# Altium PCB 3PhaseMotorDriver.PcbDoc
Units mm, origin at the board's own origin, x right, y up, seen from the top; angles counter-clockwise.
Board outline 107.82 x 93.09 mm, 2 copper layers (Top Layer, Bottom Layer); 80 components, 41 nets, 272 pads, 43 vias.
Unrouted connection lines stored in the file: 43.
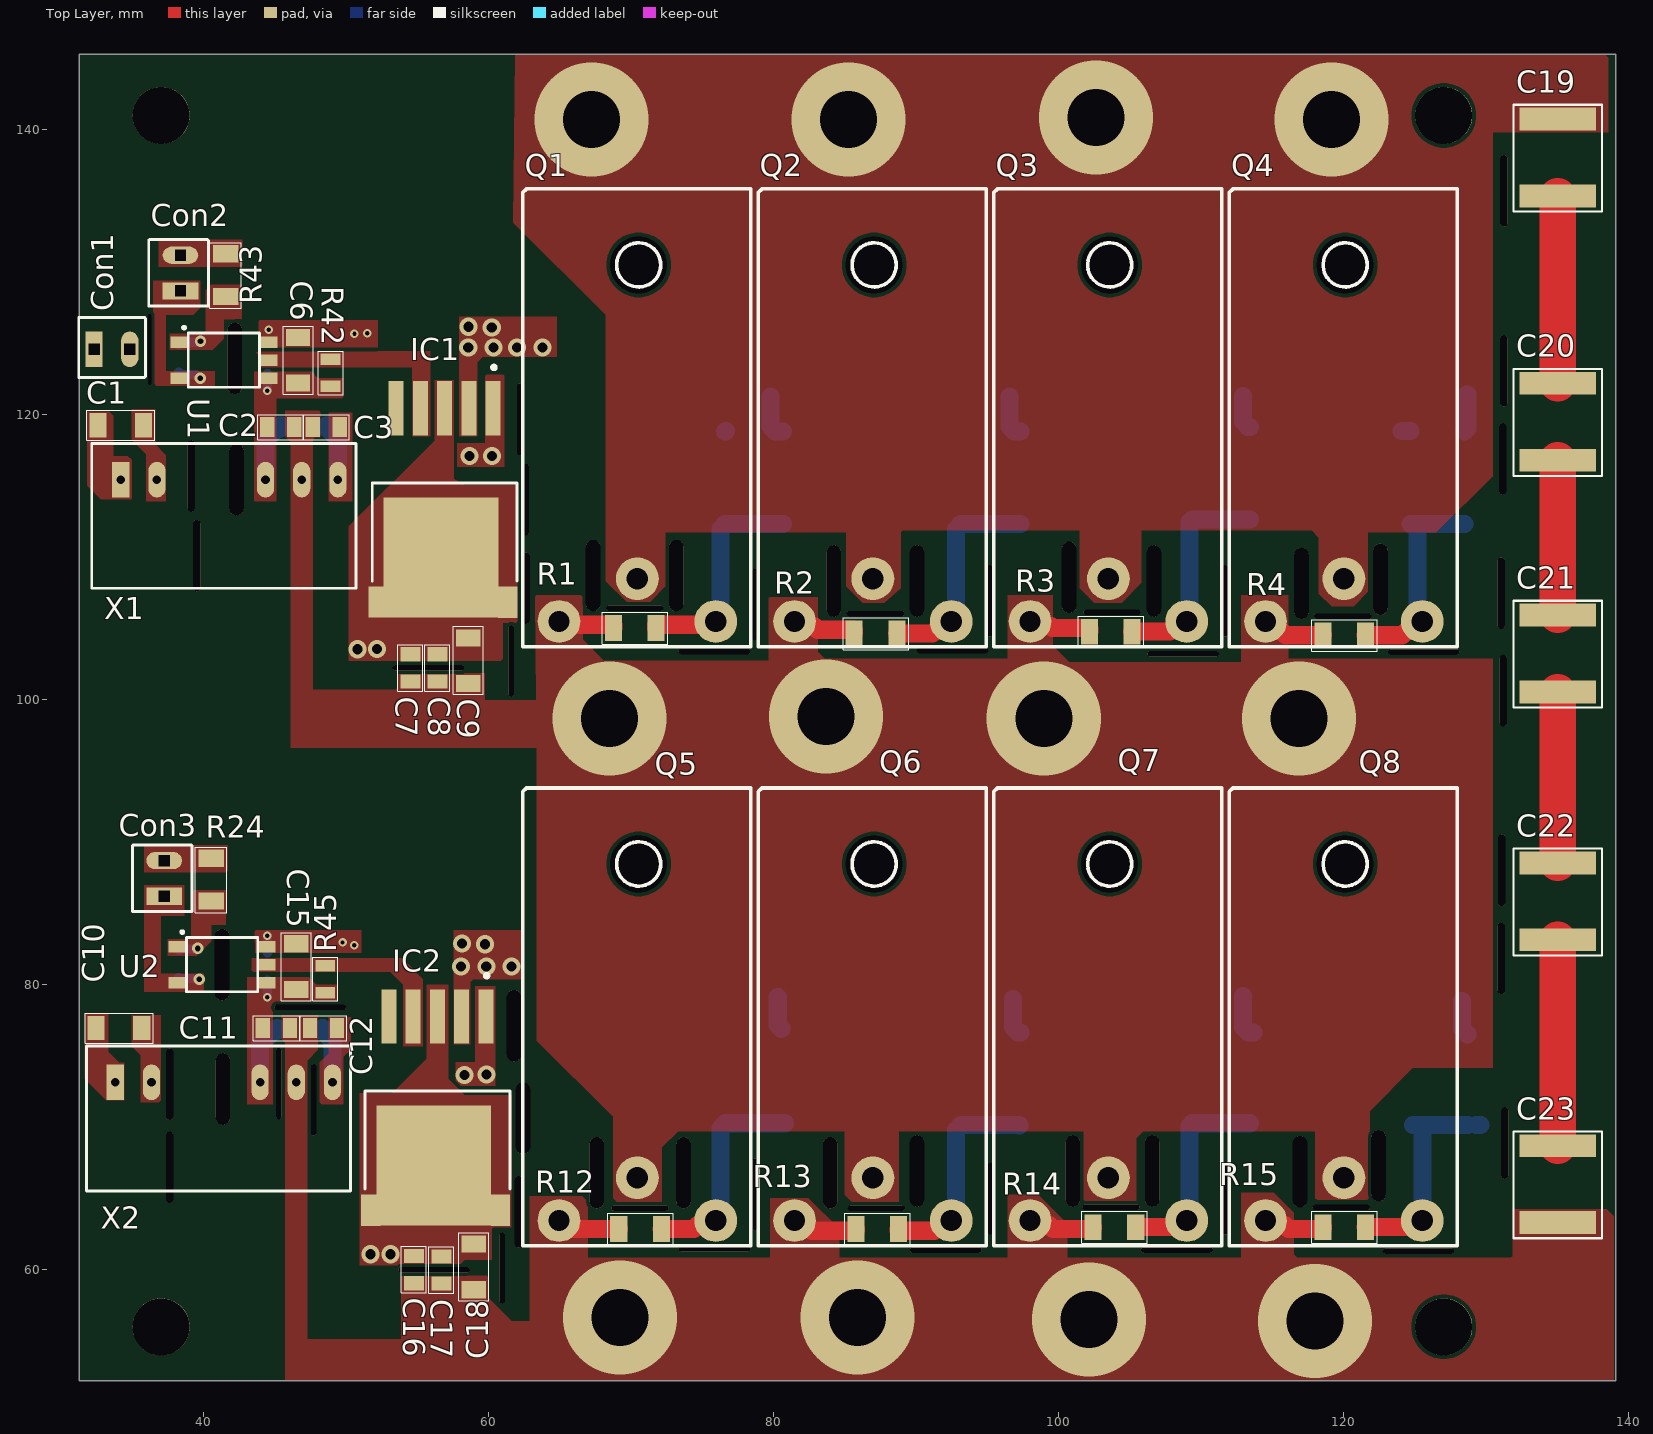
[diagram p0: Top Layer view]
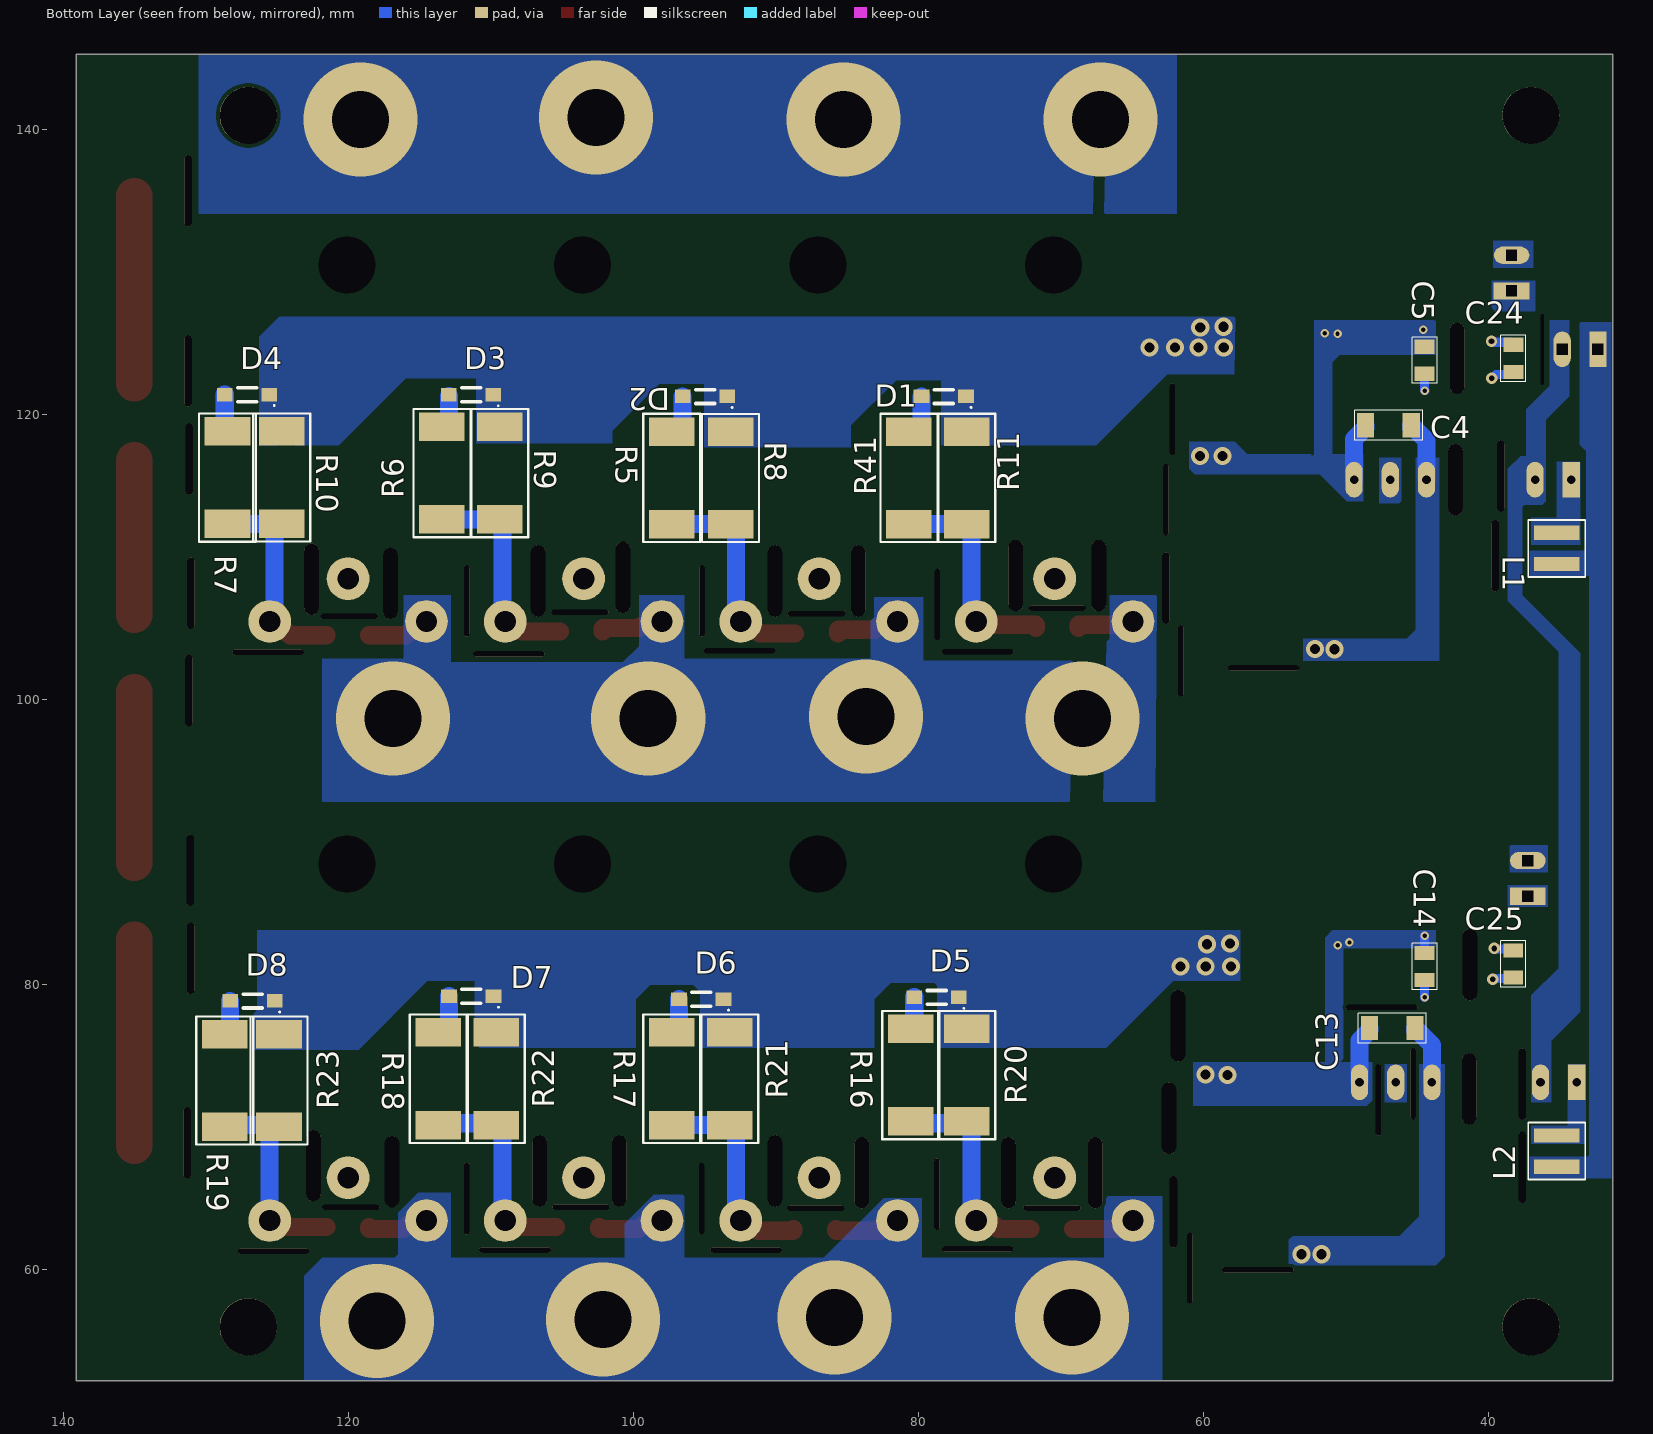
[diagram p1: Bottom Layer view, seen from below]
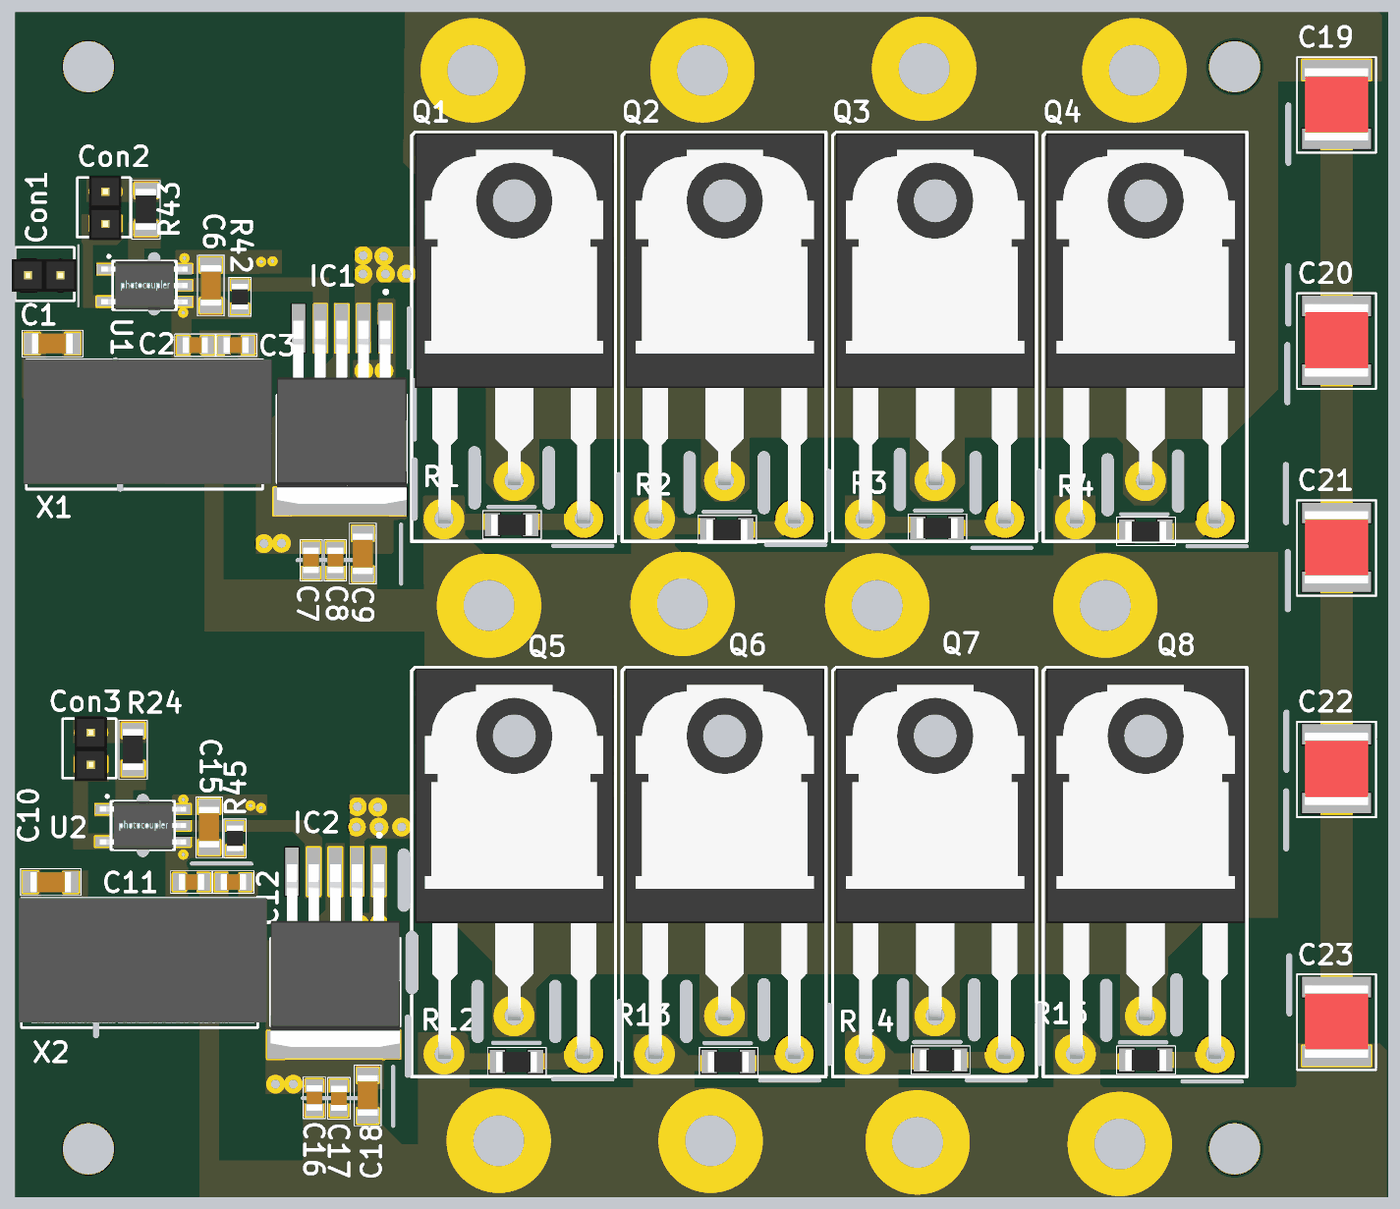
[diagram p2: 3D render of the assembled board from above, using the file's embedded part models]
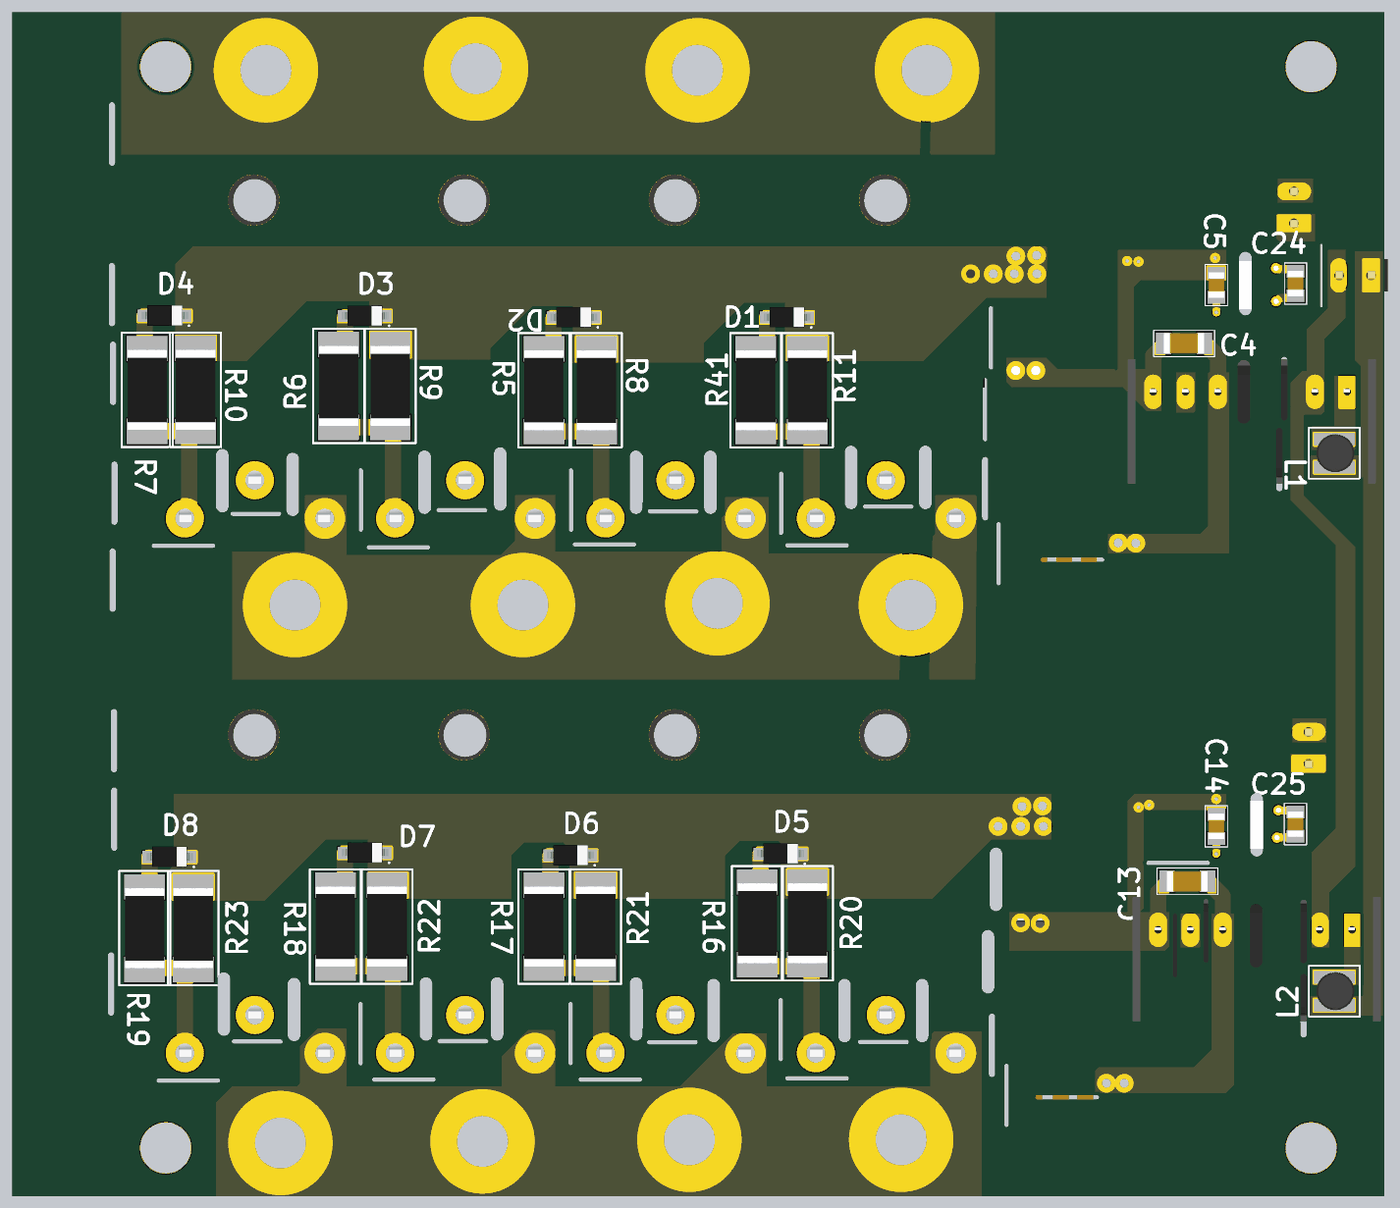
[diagram p3: 3D render of the assembled board from below, using the file's embedded part models]

## Layer stack, top to bottom
Top Solder: solder mask 0.0102, Solder Resist, Dk 3.5
Top Layer: signal copper 0.0356
Dielectric 1: dielectric 0.32, FR-4, Dk 4.8
Bottom Layer: signal copper 0.0356
Bottom Solder: solder mask 0.0102, Solder Resist, Dk 3.5

## Board outline
31.242,52.197 31.242,145.288 139.065,145.288 139.065,52.197

## Design rules (kind name [scope] priority, off if disabled: settings)
Clearance [All] p1: gap=0.254 ignorepadtopadclearanceinfootprint=FALSE except(0: Arc-Hole Track-Hole SMDPad-Hole THPad-Hole Via-Hole Fill-Hole Poly-Hole Region-Hole Text-Hole)
PolygonConnect [All] p1: connectstyle=Direct reliefconductorwidth=0.254 reliefentries=4 polygonreliefangle="90 Angle" airgapwidth=0.254
RoutingVias [All] p1: holewidth=0.711 width=1.27 viastyle="Through Hole" minholewidth=0.711 minwidth=1.27 maxholewidth=0.711 maxwidth=1.27
SolderMaskExpansion [All] p1: expansion=0.102 istentingtop=FALSE
Width [All] p1: maxlimit=3 minlimit=0.254 preferedwidth=0.254 minimp=50.000000 maximp=50.000000 favimp=50.000000
30 further rules are at their usual default settings.

## Components (designator, comment, footprint, x,y, rotation, side; value= is the part's Value field where it differs from the comment)
C1 "4.7uF" C-1206 34.163,119.253 r180 top
C2 "2.2u" C-0805 45.39,119.126 r180 top locked
C3 "2.2u" C-0805 48.59,119.126 r180 top locked
C4 "4.7uF" C-1206 46.99,119.253 r0 bottom
C5 "100nF" C-0805 44.45,123.825 r90 bottom locked
C6 "4.7uF" C-1206 46.609,123.825 r90 top locked
C7 "10nF" C-0805 54.483,102.235 r270 top
C8 "100nF" C-0805 56.388,102.235 r270 top
C9 "4.7uF" C-1206 58.547,102.743 r270 top
C10 "4.7uF" C-1206 34.036,76.962 r180 top
C11 "2.2u" C-0805 45.085,76.962 r180 top
C12 "2.2u" C-0805 48.387,76.962 r180 top
C13 "4.7uF" C-1206 46.736,76.962 r0 bottom
C14 "100nF" C-0805 44.45,81.28 r90 bottom locked
C15 "4.7uF" C-1206 46.482,81.28 r90 top locked
C16 "10nF" C-0805 54.737,60.01 r270 top locked
C17 "100nF" C-0805 56.668,59.978 r270 top
C18 "4.7uF" C-1206 58.928,60.198 r270 top locked
C19 "10uF" C-2220R 135,138.049 r90 top
C20 "10uF" C-2220R 135,119.507 r90 top
C21 "10uF" C-2220R 135,103.251 r90 top
C22 "10uF" C-2220R 135,85.852 r90 top
C23 "10uF" C-2220R 135,66.008 r90 top
C24 "10nF" C-0805 38.227,123.952 r90 bottom
C25 "10nF" C-0805 38.236,81.458 r90 bottom
Con1 "Connector" Conn 32.323,124.587 r90 top
Con2 "Connector2_1" Conn 38.354,128.716 r180 top
Con3 "Connector2_1" Conn 37.211,86.233 r180 top
D1 "1n5819" SOD123 76.693,121.335 r0 bottom
D2 "1n5819" SOD123 93.457,121.335 r0 bottom
D3 "1n5819" SOD123 109.867,121.455 r0 bottom
D4 "1n5819" SOD123 125.588,121.462 r0 bottom
D5 "1n5819" SOD123 77.201,79.171 r0 bottom
D6 "1n5819" SOD123 93.711,79.044 r0 bottom
D7 "1n5819" SOD123 109.855,79.248 r0 bottom
D8 "1n5819" SOD123 125.207,78.917 r0 bottom
IC1 "IXDN630YI" 5-LEAD_TO-263 56.893,107.955 r180 top
IC2 "IXDN630YI" 5-LEAD_TO-263 56.388,65.278 r180 top locked
L1 "10uH" WE-TPC_282892 35.179,110.617 r0 bottom
L2 "10uH" WE-TPC_282892 35.179,68.326 r0 bottom
Q1 "Sic Mosfet" 247 64.918,105.491 r0 top locked
Q2 "Sic Mosfet" 247 81.444,105.491 r0 top locked
Q3 "Sic Mosfet" 247 97.97,105.491 r0 top locked
Q4 "Sic Mosfet" 247 114.496,105.491 r0 top locked
Q5 "Sic Mosfet" 247 64.918,63.454 r0 top locked
Q6 "Sic Mosfet" 247 81.444,63.454 r0 top locked
Q7 "Sic Mosfet" 247 97.97,63.454 r0 top locked
Q8 "Sic Mosfet" 247 114.496,63.454 r0 top locked
R1 "10K" R-1206 70.231,105.029 r180 top
R2 "10K" R-1206 87.122,104.648 r180 top
R3 "10K" R-1206 103.632,104.775 r180 top
R4 "10K" R-1206 120.015,104.521 r180 top
R5 "10 1w" R-2512W 97.282,115.57 r90 bottom
R6 "10 1w" R-2512W 113.411,115.899 r90 bottom
R7 "10 1w" R-2512W 128.46,115.588 r90 bottom
R8 "10 1w" R-2512W 93.154,115.558 r270 bottom
R9 "10 1w" R-2512W 109.356,115.899 r270 bottom
R10 "10 1w" R-2512W 124.656,115.593 r270 bottom
R11 "10 1w" R-2512W 76.581,115.57 r270 bottom
R12 "10K" R-1206 70.612,62.865 r180 top
R13 "10K" R-1206 87.249,62.865 r180 top
R14 "10K" R-1206 103.886,62.992 r180 top
R15 "10K" R-1206 120.015,62.992 r180 top
R16 "10 1w" R-2512W 80.518,73.66 r90 bottom
R17 "10 1w" R-2512W 97.282,73.406 r90 bottom
R18 "10 1w" R-2512W 113.665,73.406 r90 bottom
R19 "10 1w" R-2512W 128.651,73.279 r90 bottom
R20 "10 1w" R-2512W 76.581,73.66 r270 bottom
R21 "10 1w" R-2512W 93.218,73.406 r270 bottom
R22 "10 1w" R-2512W 109.601,73.406 r270 bottom
R23 "10 1w" R-2512W 124.841,73.279 r270 bottom
R24 "10K" R-1206 40.513,87.376 r90 top
R41 "10 1w" R-2512W 80.645,115.57 r90 bottom
R42 "0" R-0805 48.895,122.936 r90 top locked
R43 "10K" R-1206 41.529,129.794 r90 top
R45 "0" R-0805 48.514,80.391 r90 top locked
U1 "TLP152" TLP152 41.402,123.571 r0 top locked
U2 "TLP152" TLP152 41.275,81.153 r0 top locked
X1 "R24P21503D" SIP7 34.163,115.443 r90 top locked
X2 "R24P21503D" SIP7 33.782,73.152 r90 top locked

## Footprints (in the part's own frame and the unit in brackets; to place one, negate y for a bottom-side part, rotate by r counter-clockwise, add the part's x,y. Pads: shape width x height; smd on the part's side, far side on the other; paste and mask are expansions set on the pad)
5-LEAD_TO-263 [mm]
  rect 1.05x3.8 smd: 1(-3.404,-12.5) 2(-1.702,-12.5) 3(0,-12.5) 4(1.702,-12.5) 5(3.404,-12.5)
  rect 1.35x2.2 smd: 6(-4.424,1.106) 6(4.675,1.1)
  rect 8.05x8.4 smd: 6(0.254,-2.032)
  silkscreen extent -5.08,-15.47 5.08,-0.38, body extent -5.08,-13.08 5.08,1.27, height 4.66
247 [mm]
  round 3 hole 1.5: 1(11,0) 2(5.5,3) 3(0,0)
  round 1.524 hole 4: 4(5.588,25.019)
  silkscreen extent -2.54,-1.78 13.46,30.35, body extent -2.29,-0.31 13.31,30.29, height 5.01
C-0805 [mm]
  rect 1x1.4 smd: 1(-0.95,0) 2(0.95,0)
  silkscreen extent -1.63,-0.87 1.63,0.87, body extent -1,-0.62 1,0.63, height 1.01
C-1206 [mm]
  rect 1.2x1.7 smd: 1(-1.6,0) 2(1.6,0)
  silkscreen extent -2.4,-1.05 2.37,1.05, body extent -1.6,-0.8 1.6,0.8, height 1
C-2220R [mm] "capacitor 2220 reflow soldering"
  rect 1.6x5.4 smd: 1(-2.7,0) 2(2.7,0)
  silkscreen extent -3.8,-3.1 3.7,3.1, body extent -2.85,-2.5 2.85,2.5, height 2.24
Conn [mm]
  rect 2.5x1.2 hole 0.762 square: 1(0,0.025)
  oval 2.5x1.2 hole 0.762 square: 2(0,-2.475)
  silkscreen extent -1.96,-3.57 2.22,1.1, body extent -1.24,-3.74 1.3,1.34, height 8.15
R-0805 [mm]
  rect 0.8x1.4 smd: 1(-0.95,0) 2(0.95,0)
  silkscreen extent -1.53,-0.87 1.53,0.87, body extent -1,-0.62 1,0.62, height 0.56
R-1206 [mm]
  rect 1.2x1.8 smd: 1(-1.5,0) 2(1.5,0)
  silkscreen extent -2.32,-1.1 2.27,1.12, body extent -1.6,-0.77 1.6,0.83, height 0.56
R-2512W [mm] "resistor 2512 wave soldering"
  rect 2x3.2 smd: 1(-3.25,0) 2(3.25,0)
  silkscreen extent -4.5,-2 4.5,2, body extent -3.15,-1.55 3.15,1.55, height 0.55
SIP7 [mm]
  rect 2.5x1.2 hole 0.6: 1(0,0)
  oval 2.5x1.2 hole 0.6: 2(0,-2.54) 5(0,-10.16) 6(0,-12.7) 7(0,-15.24)
  silkscreen extent -7.62,-16.51 2.54,2.03, body extent -7.24,-17.24 2.58,2.26, height 11.66
SOD123 [mm]
  rect 1.1x0.95 smd: a(3.063,0.05) k(-0.062,0.05)
  silkscreen extent -0.46,-0.43 2.15,0.87, body extent -0.37,-0.77 3.33,0.83, height 1.28
TLP152 [mm] "SOTFL, 5-Leads, Body 3.75x7.20mm, Pitch 1.27mm, IPC Medium Density"
  rect 1.2x0.8 smd: 1(-3.15,1.524) 2(-3.15,-1.016) 3(3.15,-1.016) 4(3.15,0.254) 5(3.15,1.524)
  silkscreen extent -2.87,-1.65 2.5,2.61, body extent -3.39,-1.65 3.38,2.15, height 2.11
WE-TPC_282892 [mm]
  rect 3.2x1 smd: 1(0,1.1) 2(0,-1.1)
  silkscreen extent -2,-2 2,2, body extent -1.57,-1.5 1.41,1.5, height 3

## Part data
C1 C4 C6 C9 C10 C13 C15 C18: library part C-1206, "MLCC (3216) 1206 4.7uF 50VDC ±10% X7R", Manufacturer=SAMSUNG, Özdisan Part Number=CL31B475KBHNNNE, Link=https://www.ozdisan.com/pasif-komponentler/kondansatorler/smd-kondansatorler-mlcc/CL31B475KBHNNNE, Price=0,10407
C2 C3 C5 C7 C8 C11 C12 C14 C16 C17 C24 C25: library part C-0805, "MLCC (2012) 0805 2.2uF 50VDC ±10% X5R", Manufacturer=SAMSUNG, Özdisan Part Number=CL21A225KBQNNNE, Link=https://www.ozdisan.com/pasif-komponentler/kondansatorler/smd-kondansatorler-mlcc/CL21A225KBQNNNE, Price=0,04880
C19 C20 C21 C22 C23: library part Cap2220, "2220", Manufacturer=SAMSUNG, Özdisan Part Number=CL31B475KBHNNNE, Link=https://www.ozdisan.com/pasif-komponentler/kondansatorler/smd-kondansatorler-mlcc/CL31B475KBHNNNE, Price=0,10407
Con1 Con2 Con3: "PIN HEADER 40PIN(1x40) 2.54mm THT V/T", Manufacturer="KLS ELECTRONIC", Özdisan Part Number=KLS1-207-1-40-S-3X9.5X15, Link=https://www.ozdisan.com/konnektor-baglanti-elemanlari/headers/pin-header/KLS1-207-1-40-S-3X9-5X15, Price=0,17227
D1 D2 D3 D4 D5 D6 D7 D8: library part 1N4148W-E3-18, "DIODE SCHOTTKY 1A 40V SOD123", Manufacturer=HOTTECH, Özdisan Part Number=B5819W, ComponentLink1Description=https://datasheet.ciiva.com/29885/1n4148w-29885941.pdf?src-supplier=Avnet, ComponentLink1URL=https://datasheet.ciiva.com/29885/1n4148w-29885941.pdf?src-supplier=Avnet, ComponentLink2Description=https://datasheet.ciiva.com/29593/1n4148w-29593113.pdf?src-supplier=Digi-Key, ComponentLink2URL=https://datasheet.ciiva.com/29593/1n4148w-29593113.pdf?src-supplier=Digi-Key, ComponentLink3Description=https://datasheet.ciiva.com/29593/1n4148w-29593111.pdf?src-supplier=Digi-Key, ComponentLink3URL=https://datasheet.ciiva.com/29593/1n4148w-29593111.pdf?src-supplier=Digi-Key, ComponentLink4Description=https://datasheet.ciiva.com/29593/1n4148w-29593112.pdf?src-supplier=Digi-Key, ComponentLink4URL=https://datasheet.ciiva.com/29593/1n4148w-29593112.pdf?src-supplier=Digi-Key, Link=https://www.ozdisan.com/guc-yari-iletkenleri/diyot-modul-diyot-dogrultucular/schottky-diyotlar/B5819W, Price=0,04258
IC1 IC2: "Integrated Circuit", Manufacturer_Name="IXYS SEMICONDUCTOR", Mouser Part Number=849-IXDN630YI, Arrow Part Number=IXDN630YI, Arrow Price/Stock=https://www.arrow.com/en/products/ixdn630yi/ixys, Datasheet Link=https://www.mouser.com/datasheet/2/240/IXD_630-1545995.pdf, Manufacturer_Part_Number=IXDN630YI, Mouser Price/Stock=https://www.mouser.co.uk/ProductDetail/IXYS-Integrated-Circuits/IXDN630YI?qs=uhAJVUz%252BE3%2FH75bq1SGVng%3D%3D
L1 L2: library part inductor, "INDUCTOR POWER 10UH 2.8X2.8X2.8MM SMD", Manufacturer=WURTH, Özdisan Part Number=744025100, Link=https://www.ozdisan.com/pasif-komponentler/induktorler/sabit-induktor/744025100, Price=0,74325
Q1 Q2 Q3 Q4 Q5 Q6 Q7 Q8: library part "Sic Mosfet To247", "SiC Mosfet To247"
R1 R2 R3 R4 R12 R13 R14 R15 R24 R43: library part R-1206_GS, "1206S4F1002T5E", ComponentLink1Description=link, ComponentLink1URL=https://www.ozdisan.com/pasif-komponentler/direncler/smt-smd-direncler/1206S4F1002T5E
R5 R6 R7 R8 R9 R10 R11 R16 R17 R18 R19 R20 R21 R22 R23 R41: library part R-2512
R42 R45: library part Res0805, "RES.(2012) 0805 0 Ohms 5% 1/8W-S 800PPM", Manufacturer=ROYALOHM, Özdisan Part Number=0805S8J0000T5E, Link=https://www.ozdisan.com/pasif-komponentler/direncler/smt-smd-direncler/0805S8J0000T5E, Price=0,00234
U1 U2: library part TLP152(TPL,E, "IC-152 PHOTOCOUPLER GATE DRIVE SO6 TOSHIBA", Manufacturer=TOSHIBA, ComponentLink1Description=https://datasheet.ciiva.com/41848/tlp152-datasheet-en-20120914-41848928.pdf?src-supplier=Digi-Key, ComponentLink1URL=https://datasheet.ciiva.com/41848/tlp152-datasheet-en-20120914-41848928.pdf?src-supplier=Digi-Key, Link=https://www.ozdisan.com/optolar-sensorler/optolar/gate-surucu-optokuplorleri/TLP152TPLE, Price=0,80155, Özdisan Part Number=TLP152(TPL,E
X1 X2: Manufacturer=Recom, Max Output Voltage=15V, Supplier Part Number 1=945-3071-5-ND, Height=12.5mm, Length=19.5mm, Manufacturer Part Number=R24P21503D, Pricing 1="1 = 8.78000, 5 = 8.71200, 10 = 8.64500, 25 = 8.51200, 50 = 8.24600, 100 = 7.44800, 250 = 7.31500, 500 = 7.18200 (USD)", RoHS=No, Stock 1=378, Supplier 1=Digi-Key, Weight=4.3g, Width=9.8mm

## Free pads (board coordinates)
  round 4 hole 4: 2(37,56) 2(37,141) 2(127,56) 2(127,141)
  oval 0.2x5 hole 0.2 slot 5 at 90 deg unplated mask+0: 110(36.195,124.587)
  oval 0.5x5 hole 0.5 slot 5 at 90 deg unplated mask+0: 110(37.592,73.025) 110(37.593,67.184) 110(39.116,115.697) 110(39.498,110.11) 110(62.078,64.066) 110(62.611,107.823) 110(131.03,107.473) 110(131.037,81.852) 110(131.065,88.027) 110(131.136,116.894) 110(131.172,100.642) 110(131.22,123.08) 110(131.22,135.706) 110(131.291,68.898)
  oval 1x5 hole 1 slot 5 at 90 deg unplated mask+0: 110(41.275,81.407) 110(41.328,72.686) 110(42.164,123.952) 110(42.291,115.443) 110(61.757,77.115) 110(62.392,70.638) 110(67.31,108.712) 110(67.564,66.802) 110(73.152,108.712) 110(73.66,66.802) 110(83.947,66.802) 110(84.201,108.331) 110(90.043,66.929) 110(90.043,108.331) 110(100.711,108.585) 110(100.965,66.929) 110(106.553,66.929) 110(106.664,108.334) 110(116.914,66.887) 110(117.017,108.162) 110(122.428,67.31) 110(122.555,108.458)
  oval 0.35x5 hole 0.35 slot 5 at 90 deg unplated mask+0: 110(45.263,73.066) 110(47.698,71.925) 110(60.934,60.127) 110(61.561,102.715) 110(62.149,119.683) 110(62.611,114.046) 110(78.648,106.684) 110(78.674,65.306) 110(95.158,106.938) 110(95.19,64.994) 110(111.668,106.938) 110(111.681,64.986)
  oval 5x0.35 hole 0.35 slot 5 at 0 deg unplated mask+0: 110(47.457,78.41) 110(55.753,102.235) 110(56.157,59.997) 110(75.819,61.468) 110(75.819,103.378) 110(92.069,61.381) 110(92.53,103.443) 110(108.284,61.38) 110(108.716,103.216) 110(125.226,61.306) 110(125.607,103.343)
  oval 4x0.35 hole 0.35 slot 4 at 0 deg unplated mask+0: 110(70.231,106.426) 110(70.607,64.328) 110(87.122,106.045) 110(87.191,64.317) 110(103.649,64.395) 110(103.727,106.136) 110(119.805,64.374) 110(119.912,105.856)

## Via types
v1: diameter 1.27, hole 0.711, Top Layer to Bottom Layer, 19 vias
v2: diameter 8, hole 4, Top Layer to Bottom Layer, 12 vias
v3: diameter 0.6, hole 0.3, Top Layer to Bottom Layer, 8 vias
v4: diameter 0.8, hole 0.4, Top Layer to Bottom Layer, 4 vias

## Nets (pads, with @x,y where several pads share a name; then routed paths per layer and width w, separated by ;. In a path a pad name is that pad's centre, name@x,y a point inside that pad or via, vN(x,y) a via of type N, cw(c..) or ccw(c..) an arc to the next point about the centre after c; other vN are vias at no path point)
GND: C11.1 C12.2 C16.2 C17.2 C18.2 C23.1 Q5.3 Q6.3 Q7.3 Q8.3 R12.2 R13.2 R14.2 R15.2 X2.6 | length 18.3
  Top Layer w1.27: Q5.3 65.386,63.454 65.975,62.865 R12.2 ; Q6.3 81.912,63.454 82.628,62.738 85.714,62.738 85.749,62.773 R13.2 ; Q7.3 98.301,63.123 99.321,63.123 99.579,62.865 102.351,62.865 102.386,62.9 R14.2 ; Q8.3 114.827,63.123 115.847,63.123 116.105,62.865 118.48,62.865 118.515,62.9 R15.2
  other v2: 117.983,56.388 102.108,56.515 69.215,56.642 85.852,56.642
HV: C19.2 Q1.2 Q2.2 Q3.2 Q4.2
  other v2: 67.183,140.716 85.217,140.716 119.126,140.716 102.616,140.843
NetC1_1: C1.1 C10.1 Con1.2 X1.2 X2.2
NetC1_2: C1.2 L1.2 X1.1
NetC2_2: C2.2 C4.1 C5.1 C6.1 C7.1 C8.1 C9.1 IC1.3 IC1.6 R42.1 U1.3 X1.5 | length 5.5
  Bottom Layer w0.635: v3(44.442,121.686) 44.45,121.694 C5.1
  Bottom Layer w1.27: X1.5 44.323,118.186 45.175,119.038 45.355,119.038 45.39,119.073 C4.1
  other v1: 50.776,103.543 52.152,103.566
NetC3_1: C3.1 C4.2 C5.2 C6.2 IC1.1 U1.5 X1.7 | length 4.2
  Bottom Layer w1.27: C4.2 48.59,119.073 48.625,119.038 48.659,119.038 49.403,118.294 X1.7
  other v1: 58.628,117.114 60.206,117.114
  other v3: 50.564,125.675 51.456,125.723 44.541,125.96
NetC10_2: C10.2 L2.2 X2.1
NetC11_2: C11.2 C13.1 C14.1 C15.1 C16.1 C17.1 C18.1 IC2.3 IC2.6 R45.1 U2.3 X2.5 | length 5.6
  Bottom Layer w0.635: v3(44.45,79.121) C14.1
  Bottom Layer w1.27: X2.5 43.942,75.768 44.921,76.747 45.101,76.747 45.136,76.782 C13.1
  other v1: 51.689,61.087 53.086,61.087
NetC12_1: C12.1 C13.2 C14.2 C15.2 IC2.1 U2.5 X2.7 | length 5.3
  Bottom Layer w0.635: C14.2 v3(44.45,83.439)
  Bottom Layer w1.27: C13.2 48.336,76.782 49.022,76.096 X2.7
  other v1: 58.293,73.66 59.82,73.702
  other v3: 50.553,82.778 49.731,82.967
NetC19_1: C19.1 C20.2 | length 13.1
  Top Layer w2.54: C20.2 C19.1
NetC20_1: C20.1 C21.2 | length 10.9
  Top Layer w2.54: C21.2 C20.1
NetC21_1: C21.1 C22.2 | length 12
  Top Layer w2.54: C22.2 C21.1
NetC22_1: C22.1 C23.2 | length 14.4
  Top Layer w2.54: C23.2 C22.1
NetC24_1: C24.1 Con2.1 U1.2 | length 1.7
  Bottom Layer w0.635: C24.1 38.41,122.82 39.442,122.82 39.706,122.555 v4(39.751,122.555)
NetC24_2: C24.2 R43.1 U1.1 | length 1.6
  Bottom Layer w0.635: C24.2 38.41,125.085 39.642,125.085 39.716,125.159 v4(39.761,125.159)
NetC25_1: C25.1 Con3.1 U2.2 | length 1.5
  Bottom Layer w0.635: C25.1 38.316,80.427 39.65,80.427 v4(39.681,80.395)
NetC25_2: C25.2 R24.1 U2.1 | length 1.4
  Bottom Layer w0.635: C25.2 38.344,82.516 39.532,82.516 v4(39.564,82.547)
NetCon1_1: Con1.1 L1.1 L2.1
NetCon2_2: Con2.2 R43.2
NetCon3_2: Con3.2 R24.2
NetD1_a: D1.a R41.2 | length 3.1
  Bottom Layer w1.27: D1.a 79.756,119.185 80.121,118.82 R41.2
NetD1_k: D1.k D2.k D3.k D4.k IC1.2 R8.1 R9.1 R10.1 R11.1 | length 0.9
  Bottom Layer w0.635: R10.1 R10.1@124.843,118.843
  Bottom Layer w1.27: R11.1 R11.1@76.631,118.87 ; R10.1@124.056,118.843 R10.1
  other v1: 58.547,124.714 60.325,124.714 61.976,124.714 63.754,124.714 60.198,126.111 58.568,126.171
NetD2_a: D2.a R5.2 | length 3
  Bottom Layer w1.27: D2.a 96.52,119.185 96.885,118.82 R5.2
NetD3_a: D3.a R6.2 | length 2.4
  Bottom Layer w1.27: D3.a@112.918,121.301 112.918,119.514 113.283,119.149 R6.2
NetD4_a: D4.a R7.2 | length 2.9
  Bottom Layer w0.635: D4.a@128.46,121.254 128.618,121.412 D4.a
  Bottom Layer w1.27: R7.2 128.651,119.029 D4.a
NetD5_a: D5.a R16.2 | length 2.3
  Bottom Layer w1.27: D5.a 80.264,77.164 R16.2
NetD5_k: D5.k D6.k D7.k D8.k IC2.2 R20.1 R21.1 R22.1 R23.1
  other v1: 58.039,81.28 59.817,81.28 61.595,81.28 59.721,82.843 58.112,82.885
NetD6_a: D6.a R17.2 | length 2.6
  Bottom Layer w1.27: D6.a 96.774,77.021 97.139,76.656 R17.2
NetD7_a: D7.a R18.2 | length 3.2
  Bottom Layer w0.635: D7.a D7.a@112.993,79.198
  Bottom Layer w1.27: D7.a 112.918,77.021 113.283,76.656 R18.2
NetD8_a: D8.a R19.2 | length 2.5
  Bottom Layer w1.27: D8.a 128.27,76.894 128.635,76.529 R19.2
NetIC1_4: IC1.4 R42.2 U1.4
NetIC2_4: IC2.4 R45.2 U2.4
NetQ1_1: Q1.1 R1.1 R11.2 R41.1 | length 15.7
  Top Layer w1.27: R1.1 71.731,105.225 71.766,105.26 75.687,105.26 Q1.1
  Bottom Layer w1.27: Q1.1 76.249,105.822 76.249,111.988 R11.2 R41.1
NetQ2_1: Q2.1 R2.1 R5.1 R8.2 | length 15.4
  Top Layer w1.27: R2.1 91.133,104.648 91.976,105.491 Q2.1
  Bottom Layer w1.27: Q2.1 92.775,105.822 92.775,111.955 93.14,112.32 93.218,112.32 R5.1
NetQ3_1: Q3.1 R3.1 R6.1 R9.2 | length 15.5
  Top Layer w1.27: R3.1 107.786,104.775 108.502,105.491 Q3.1
  Bottom Layer w1.27: Q3.1 109.158,105.68 109.158,112.46 109.347,112.649 R6.1
NetQ4_1: Q4.1 R4.1 R7.1 R10.2 | length 15.3
  Top Layer w1.27: R4.1 124.058,104.521 125.028,105.491 Q4.1
  Bottom Layer w1.27: R10.2 124.658,112.34 R10.2@124.803,112.34 ; Q4.1 125.165,105.822 125.165,111.978 R10.2@124.803,112.34 ; R7.1 128.457,112.34 R10.2@124.803,112.34
NetQ5_1: Q5.1 R12.1 R16.1 R20.2 | length 15.3
  Top Layer w1.27: R12.1 74.375,62.865 74.633,63.123 75.587,63.123 Q5.1
  Bottom Layer w1.27: Q5.1 76.249,63.785 76.249,69.918 76.614,70.283 76.708,70.283 R16.1@80.772,70.283
NetQ6_1: Q6.1 R13.1 R17.1 R21.2 | length 15.2
  Top Layer w1.27: R13.1 88.749,62.773 88.784,62.738 91.26,62.738 91.976,63.454 Q6.1
  Bottom Layer w1.27: Q6.1 92.775,63.785 92.775,69.791 93.14,70.156 R21.2 93.228,70.146 97.235,70.146 R17.1@97.245,70.136
NetQ7_1: Q7.1 R14.1 R18.1 R22.2 | length 14.8
  Top Layer w1.27: R14.1@105.421,63.001 108.049,63.001 108.502,63.454 Q7.1
  Bottom Layer w1.27: Q7.1 109.159,63.643 109.159,70.094 109.347,70.283 R18.1@113.411,70.283
NetQ8_1: Q8.1 R15.1 R19.1 R23.2 | length 15.1
  Top Layer w1.27: R15.1 124.566,62.992 125.028,63.454 Q8.1
  Bottom Layer w1.27: R23.2@124.841,70.156 125.496,70.156 R19.1@128.651,70.156 ; R23.2@125.131,70.156 125.496,69.791 Q8.1 ; R19.1@129.286,70.156 R19.1@129.576,70.156
Source: C2.1 C3.2 C7.2 C8.2 C9.2 Q1.3 Q2.3 Q3.3 Q4.3 Q5.2 Q6.2 Q7.2 Q8.2 R1.2 R2.2 R3.2 R4.2 X1.6 | length 17.8
  Top Layer w1.27: Q1.3 65.149,105.26 68.696,105.26 68.731,105.225 R1.2 ; Q2.3 81.775,105.16 82.8,105.16 83.047,104.913 85.587,104.913 85.622,104.878 R2.2 ; Q3.3 98.301,105.16 99.437,105.16 99.557,105.04 102.097,105.04 102.132,105.005 R3.2 ; Q4.3 114.964,105.491 115.935,104.521 R4.2
  other v2: 68.453,98.679 98.933,98.679 116.84,98.679 83.648,98.813
pads on no net: IC1.5 IC2.5 Q1.4 Q2.4 Q3.4 Q4.4 Q5.4 Q6.4 Q7.4 Q8.4

## Polygon pours and split planes (outlines as drawn)
HV on Top Layer "HV_L01_P000" (solid, pour order 0): 138.303,145.288 138.557,145.034 138.557,139.827 130.429,139.827 130.429,115.697 126.492,111.76 121.683,111.76 121.683,107.568 120.668,106.553 119.126,106.553 118.237,107.442 118.237,111.379 117.729,111.887 105.791,111.887 105.791,108.204 104.394,106.807 102.489,106.807 101.473,107.823 101.473,111.887 89.027,111.887 88.9,111.76 88.9,107.823 88.011,107.061 87.757,106.807 86.233,106.807 85.09,107.95 85.09,111.76 73.452,111.76 72.39,111.76 72.39,107.95 71.247,106.807 69.723,106.807 68.199,108.331 68.199,127 61.722,133.477 61.849,145.288
NetC3_1 on Top Layer "NETC3_1_L01_P049" (solid, pour order 49): 48.768,113.919 48.768,120.142 50.419,120.142 50.419,113.919
NetC24_1 on Top Layer "NETC24_1_L01_P040" (solid, pour order 40): 40.767,123.063 37.338,123.063 37.338,127 39.243,127 39.751,127.508 39.751,129.413 36.46,129.413 36.441,122.047 40.767,122.047
NetCon2_2 on Top Layer "NETCON2_2_L01_P042" (solid, pour order 42): 36.832,132.276 42.674,132.276 42.674,130.498 42.547,130.371 36.832,130.371
NetC24_2 on Top Layer "NETC24_2_L01_P041" (solid, pour order 41): 37.592,125.694 40.132,125.694 40.132,128.747 40.508,129.123 42.667,129.123 42.667,126.71 41.402,126.71 41.402,125.318 40.635,124.551 37.592,124.551
NetCon3_2 on Top Layer "NETCON3_2_L01_P039" (solid, pour order 39): 35.814,89.789 41.656,89.789 41.656,88.011 41.529,87.884 35.814,87.884
NetC25_1 on Top Layer "NETC25_1_L01_P038" (solid, pour order 38): 40.005,80.772 36.957,80.772 36.957,84.836 38.608,84.836 38.608,86.995 35.814,86.995 35.814,79.502 40.005,79.502
NetC25_2 on Top Layer "NETC25_2_L01_P037" (solid, pour order 37): 37.465,83.185 39.116,83.185 39.116,86.36 39.37,86.614 41.529,86.614 41.529,84.201 40.513,84.201 40.513,83.058 39.497,82.042 37.465,82.042
NetD5_k on Top Layer "NETD5_K_L01_P033" (solid, pour order 33): 57.531,75.819 57.531,83.82 62.357,83.82 62.357,80.391 58.894,80.391 58.674,80.171 58.674,75.819
Source on Top Layer "SOURCE_L01_P001" (solid, pour order 1): 130.429,102.87 130.429,74.168 124.841,74.168 121.793,71.12 121.793,64.897 118.11,64.897 117.983,65.024 117.983,69.723 105.918,69.723 105.41,69.215 105.41,64.77 101.854,64.77 101.727,64.897 101.727,69.723 88.773,69.723 88.773,64.77 85.471,64.77 84.963,65.278 84.963,69.723 73.279,69.723 72.136,68.58 72.136,64.77 68.961,64.77 68.707,65.024 68.707,70.739 63.373,76.073 63.373,95.758 63.363,96.647 46.101,96.647 46.101,118.11 45.72,118.491 45.72,120.269 48.175,120.269 48.17,118.404 47.792,118.404 47.625,118.237 47.625,100.711 53.467,100.711 53.594,100.838 53.594,101.854 59.69,101.854 59.69,99.949 63.327,99.95 63.246,107.315 66.575,107.316 66.575,104.24 68.072,102.743 79.629,102.743 79.629,107.141 79.615,107.155 79.648,107.188 83.058,107.188 83.058,103.378 83.566,102.87 96.393,102.87 96.393,107.315 99.568,107.315 99.568,103.782 100.734,102.616 112.776,102.616 112.776,107.315 116.078,107.315 116.078,102.87
NetC1_1 on Top Layer "NETC1_1_L01_P031" (solid, pour order 31): 36.576,120.396 36.576,117.919 37.338,117.157 37.338,113.919 35.941,113.919 35.941,117.221 34.925,118.237 34.925,120.396
NetC1_2 on Top Layer "NETC1_2_L01_P030" (solid, pour order 30): 34.807,114.05 32.77,114.05 31.81,115.002 31.81,120.221 33.343,120.221 33.655,119.909 33.655,117.094 34.671,117.094 34.925,116.84 34.925,114.046
NetC2_2 on Top Layer "NETC2_2_L01_P025" (solid, pour order 25): 56.215,118.216 56.234,118.197 52.984,114.947 52.947,114.947 50.165,112.166 50.165,102.743 60.833,102.743 60.96,102.87 60.96,105.41 61.976,105.41 61.976,115.062 58.289,115.062 57.531,115.52 57.531,122.428 56.25,122.428 56.215,122.463
NetD1_k on Top Layer "NETD1_K_L01_P024" (solid, pour order 24): 57.912,118.491 57.912,126.873 64.77,126.873 64.77,124.079 59.563,124.079 59.182,123.698 59.182,118.491
NetIC1_4 on Top Layer "NETIC1_4_L01_P023" (solid, pour order 23): 54.61,118.491 54.61,123.317 49.911,123.317 43.815,123.317 43.815,124.206 43.688,124.333 43.815,124.46 55.88,124.46 55.88,118.491
NetC3_1 on Top Layer "NETC3_1_L01_P022" (solid, pour order 22): 43.837,124.707 43.837,126.57 43.886,126.619 52.197,126.619 52.197,124.747
NetC3_1 on Top Layer "NETC3_1_L01_P020" (solid, pour order 20): 59.724,122.805 61.087,122.811 61.087,117.856 61.087,116.332 57.785,116.332 57.785,117.983 59.689,117.983 59.752,118.046
NetC2_2 on Top Layer "NETC2_2_L01_P019" (solid, pour order 19): 43.561,113.919 43.528,113.952 43.528,123.003 47.558,123.003 48.006,122.555 49.784,122.555 49.784,121.253 49.785,121.253 49.69,121.158 45.085,121.158 45.085,113.919
NetC12_1 on Top Layer "NETC12_1_L01_P018" (solid, pour order 18): 57.658,74.549 59.055,74.549 59.055,79.883 60.452,79.883 60.452,72.92 60.466,72.907 60.457,72.898 58.039,72.898 57.658,73.279
NetC11_2 on Top Layer "NETC11_2_L01_P015" (solid, pour order 15): 57.15,73.406 58.293,72.263 61.595,72.263 61.595,67.818 61.595,65.405 61.595,62.992 60.325,62.992 60.198,62.865 60.198,60.706 58.293,60.706 57.912,60.325 50.927,60.325 50.927,72.39 53.213,72.39 55.626,74.803 55.626,80.01 57.15,80.01
NetC12_1 on Top Layer "NETC12_1_L01_P014" (solid, pour order 14): 43.594,82.231 51.054,82.231 51.054,83.82 43.555,83.82
NetC12_1 on Top Layer "NETC12_1_L01_P013" (solid, pour order 13): 48.768,77.724 48.768,75.184 48.133,74.549 48.133,71.755 48.26,71.628 49.784,71.628 49.784,74.93 50.292,75.438 50.292,77.724
NetIC2_4 on Top Layer "NETIC2_4_L01_P012" (solid, pour order 12): 43.375,81.831 43.388,81.843 53.92,81.843 55.372,80.391 55.372,75.692 53.975,75.692 53.975,80.01 53.085,80.9 43.371,80.9
NetC11_2 on Top Layer "NETC11_2_L01_P011" (solid, pour order 11): 43.053,71.628 43.053,80.518 47.371,80.518 47.879,80.01 49.403,80.01 49.403,78.867 49.276,78.74 44.831,78.74 44.831,71.628
GND on Top Layer "GND_L01_P010" (solid, pour order 10): 45.72,75.946 45.466,76.2 45.466,77.851 48.006,77.851 48.006,75.438 47.244,74.676 47.244,71.755 45.847,71.755 45.72,71.882
NetC1_1 on Top Layer "NETC1_1_L01_P008" (solid, pour order 8): 34.925,77.851 36.957,77.851 36.957,71.882 36.83,71.755 35.56,71.755 35.56,75.057 34.925,75.692
NetC10_2 on Top Layer "NETC10_2_L01_P007" (solid, pour order 7): 31.623,77.978 33.274,77.978 33.274,75.311 34.07,74.515 34.426,74.515 34.426,71.891 33.147,71.882 31.623,73.406
GND on Top Layer "GND_L01_P004" (solid, pour order 4): 45.72,52.197 45.72,70.485 45.72,74.634 47.244,74.634 47.244,55.118 53.849,55.118 53.85,59.562 59.944,59.563 59.944,58.039 61.595,56.388 63.373,56.388 67.564,52.197
GND on Top Layer "GND_L01_P003" (solid, pour order 3): 131.699,60.833 131.826,60.96 131.826,64.262 138.43,64.262 138.938,63.754 138.938,60.833 138.938,52.197 67.056,52.197 62.865,56.388 62.865,65.151 66.548,65.151 66.929,64.77 66.929,60.833 79.756,60.833 79.756,65.024 82.423,65.024 84.582,62.865 84.582,60.833 96.393,60.833 96.393,65.151 96.52,65.278 98.552,65.278 100.584,63.246 100.584,60.833 112.776,60.833 112.776,65.405 115.062,65.405 116.459,64.008 116.459,61.087 116.713,60.833
NetC25_1 on Bottom Layer "NETC25_1_L02_P048" (solid, pour order 48): 35.814,86.995 38.608,86.995 38.608,85.471 35.814,85.471
NetCon3_2 on Bottom Layer "NETCON3_2_L02_P047" (solid, pour order 47): 35.814,89.789 38.354,89.789 38.481,89.916 38.481,87.884 35.814,87.884
GND on Bottom Layer "GND_L02_P046" (solid, pour order 46): 45.72,74.422 47.244,74.422 47.244,71.755 45.72,71.755
Source on Bottom Layer "SOURCE_L02_P045" (solid, pour order 45): 46.101,116.967 47.625,116.967 47.625,113.792 46.228,113.792 46.101,113.919
NetC24_1 on Bottom Layer "NETC24_1_L02_P044" (solid, pour order 44): 36.703,129.413 39.751,129.413 39.751,127.508 39.497,127.254 36.703,127.254
NetCon2_2 on Bottom Layer "NETCON2_2_L02_P043" (solid, pour order 43): 36.83,132.207 39.624,132.207 39.624,130.302 36.83,130.302
NetC1_1 on Bottom Layer "NETC1_1_L02_P036" (solid, pour order 36): 33.528,103.251 37.592,107.315 37.592,113.538 37.465,113.665 36.195,113.665 35.941,113.919 35.941,117.094 37.719,117.094 38.608,116.205 38.608,106.934 35.052,103.378 35.052,81.153 36.957,79.248 36.957,71.755 35.56,71.755 35.56,76.073 33.528,78.105
NetCon1_1 on Bottom Layer "NETCON1_1_L02_P035" (solid, pour order 35): 31.369,66.421 37.084,66.421 37.084,67.945 33.02,67.945 32.893,68.072 32.893,108.712 37.084,108.712 37.084,110.403 37.032,110.447 33.119,110.447 33.119,117.447 33.578,117.906 33.578,126.498 31.369,126.489
NetC1_1 on Bottom Layer "NETC1_1_L02_P034" (solid, pour order 34): 35.687,126.619 35.687,122.047 37.338,120.396 37.338,113.919 35.941,113.919 35.941,119.634 34.29,121.285 34.29,126.619
NetC1_2 on Bottom Layer "NETC1_2_L02_P032" (solid, pour order 32): 35.179,112.776 36.957,112.776 36.957,110.871 35.179,110.871 33.528,110.871 33.528,116.713 35.179,116.713
Source on Bottom Layer "SOURCE_L02_P029" (solid, pour order 29): 63.246,107.315 66.548,107.315 66.548,104.267 68.072,102.743 79.629,102.743 79.629,107.188 83.058,107.188 83.058,105.791 83.312,105.537 83.312,102.87 96.393,102.87 96.393,107.315 99.568,107.315 99.568,103.759 100.711,102.616 112.776,102.616 112.776,107.315 116.078,107.315 116.078,102.87 121.793,102.87 121.793,92.837 120.142,92.837 63.373,92.837
HV on Bottom Layer "HV_L02_P028" (solid, pour order 28): 61.849,145.288 130.429,145.288 130.475,145.242 130.475,134.094 61.849,134.094
GND on Bottom Layer "GND_L02_P027" (solid, pour order 27): 62.865,65.151 66.675,65.151 66.929,64.897 66.929,60.833 79.756,60.833 79.756,65.024 82.423,65.024 86.614,60.833 96.393,60.833 96.393,65.151 96.52,65.278 98.552,65.278 100.584,63.246 100.584,60.833 112.776,60.833 112.776,65.405 115.062,65.405 116.459,64.008 116.459,61.087 116.713,60.833 121.793,60.833 123.063,59.563 123.063,52.197 62.865,52.197
NetC2_2 on Bottom Layer "NETC2_2_L02_P026" (solid, pour order 26): 52.959,104.267 45.72,104.267 45.085,104.902 45.085,116.967 43.434,116.967 43.434,102.743 52.959,102.743
NetC3_1 on Bottom Layer "NETC3_1_L02_P021" (solid, pour order 21): 50.927,117.221 50.927,123.698 50.419,124.206 43.688,124.206 43.688,126.746 43.815,126.619 52.197,126.619 52.197,117.221 52.324,117.094 52.451,117.221 56.896,117.221 57.785,118.11 60.96,118.11 60.96,116.205 60.579,115.824 51.816,115.824 49.911,113.919 48.768,113.919 48.768,117.221
NetC12_1 on Bottom Layer "NETC12_1_L02_P017" (solid, pour order 17): 50.419,74.549 50.165,74.803 50.165,82.55 43.815,82.55 43.688,82.677 43.688,83.82 50.927,83.82 51.435,83.312 51.435,74.549 60.706,74.549 60.706,71.501 48.514,71.501 48.133,71.882 48.133,74.549
NetC11_2 on Bottom Layer "NETC11_2_L02_P016" (solid, pour order 16): 43.053,74.422 43.053,60.96 43.688,60.325 53.975,60.325 53.975,62.103 53.721,62.357 46.228,62.357 44.831,63.754 44.831,74.422
NetC10_2 on Bottom Layer "NETC10_2_L02_P006" (solid, pour order 6): 34.417,70.104 36.957,70.104 36.957,68.834 33.147,68.834 33.147,74.422 34.417,74.422
NetD5_k on Bottom Layer "NETD5_K_L02_P005" (solid, pour order 5): 95.272,75.565 95.272,79.524 95.758,80.01 98.806,80.01 99.822,78.994 99.822,75.565 110.744,75.565 111.125,75.946 111.125,80.264 114.427,80.264 119.253,75.438 126.619,75.438 126.619,77.978 126.365,78.232 126.365,83.82 57.404,83.82 57.404,80.264 62.103,80.264 66.802,75.565 78.664,75.565 78.664,79.934 78.867,80.137 81.915,80.137 83.058,78.994 83.058,75.565
NetD1_k on Bottom Layer "NETD1_K_L02_P002" (solid, pour order 2): 57.743,126.873 124.841,126.873 126.238,125.476 126.238,117.856 120.65,117.856 115.951,122.555 110.998,122.555 110.998,117.983 101.473,117.983 101.473,118.872 98.171,122.174 94.996,122.174 94.996,117.729 84.709,117.729 84.709,119.253 81.534,122.428 78.359,122.428 78.359,117.856 67.48,117.856 62.506,122.831 57.797,122.831

## Silkscreen, mask and mechanical layers (free items; w line width, h text height)
Mechanical 1:
  the board outline again, w0.254